# Altium PCB MyPCB1 — копия — копия.PcbDoc
Units mm, origin at the board's own origin, x right, y up, seen from the top; angles counter-clockwise.
Board outline 134 x 67 mm, 2 copper layers (Top Layer, Bottom Layer), stack 1.535 mm thick; 52 components, 66 nets, 237 pads, 60 vias.
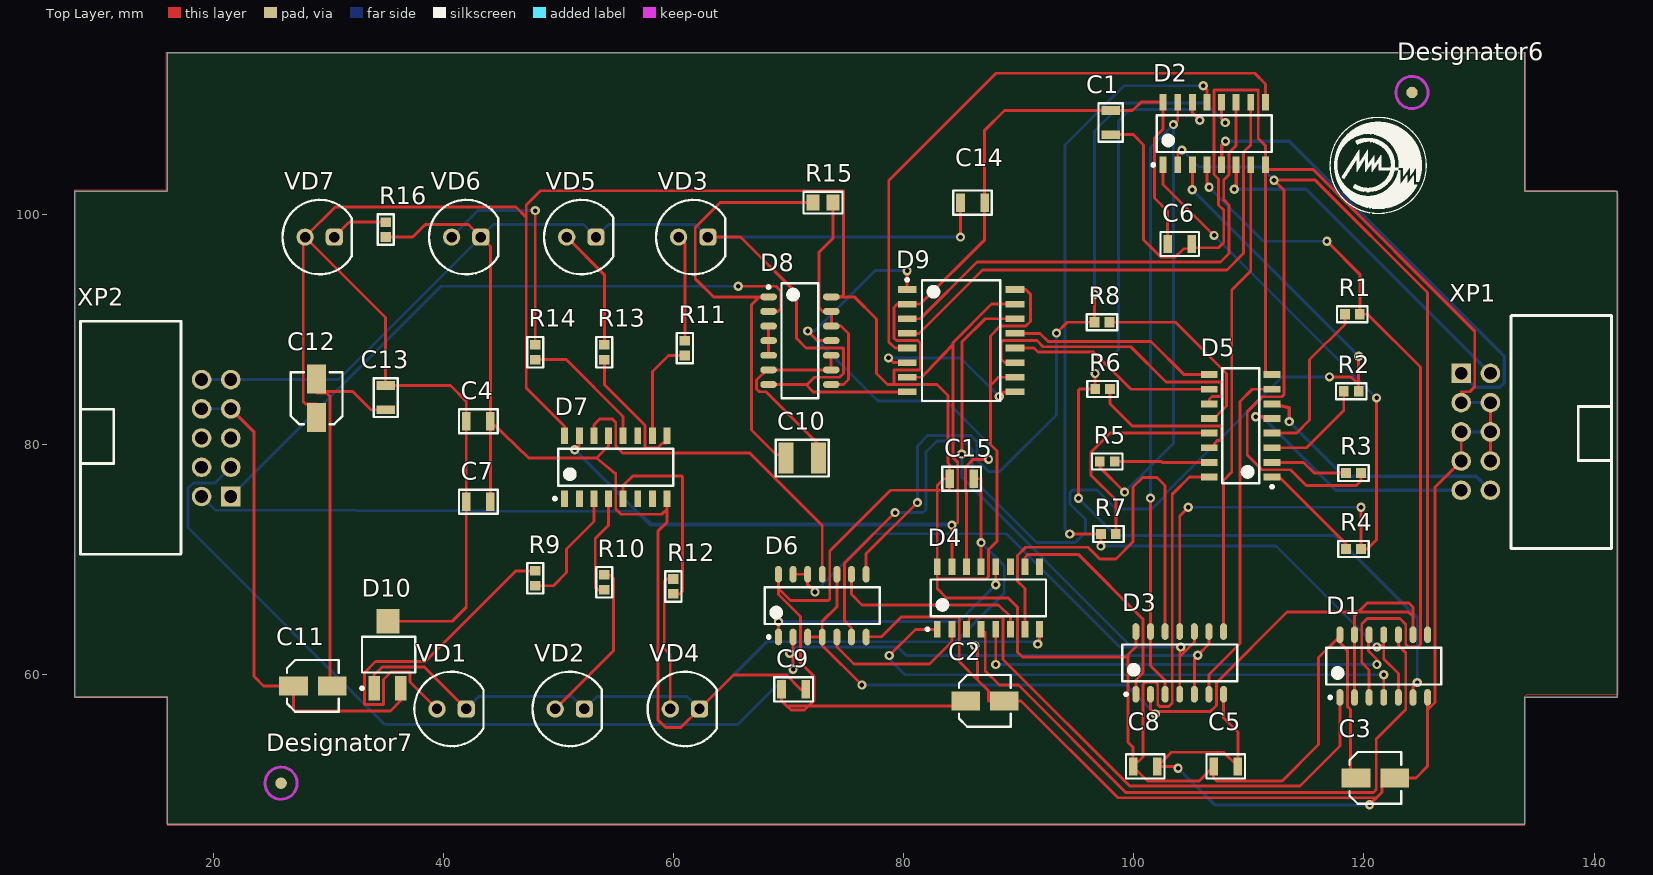
[diagram p0: Top Layer view]
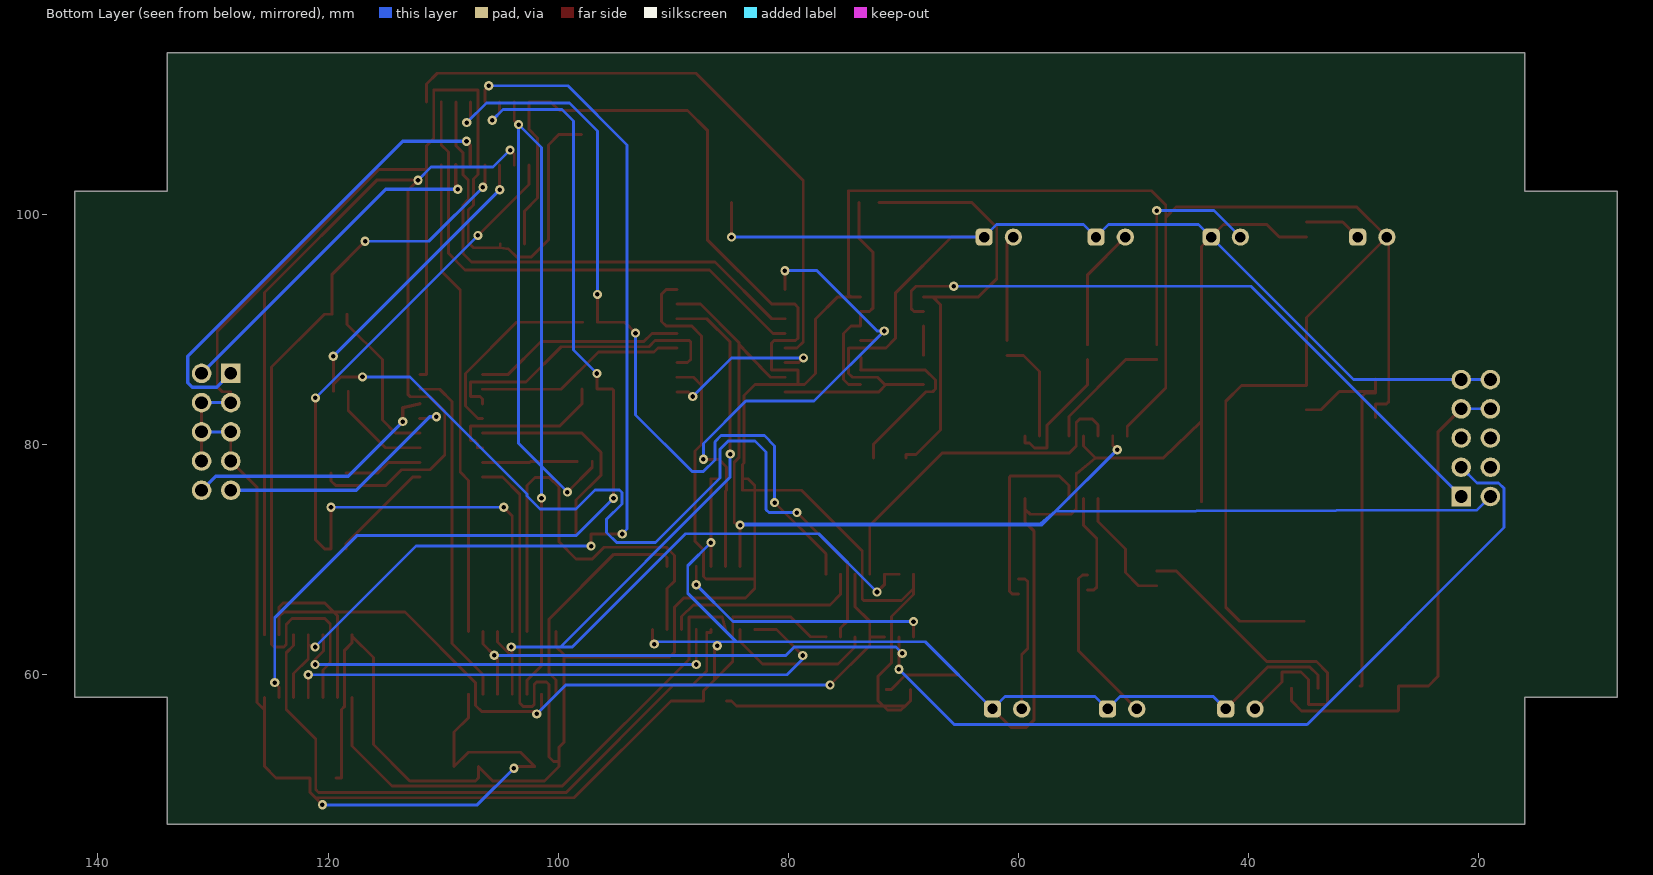
[diagram p1: Bottom Layer view, seen from below]
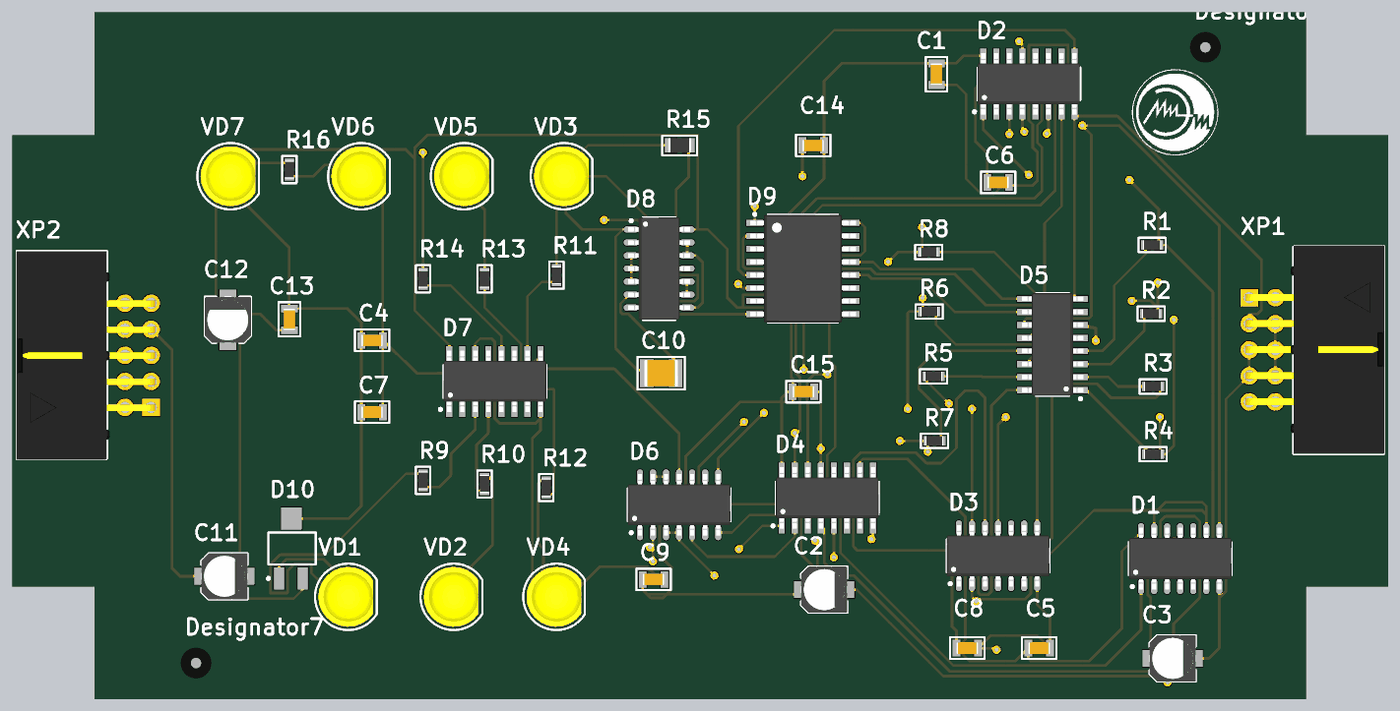
[diagram p2: 3D render of the assembled board from above, using the file's embedded part models]

## Layer stack, top to bottom
Top Solder: solder mask 0.0102, Solder Resist, Dk 3.5
Top Layer: signal copper 0.018
Dielectric 1: core 1.4986, Core-043, Dk 4.3
Bottom Layer: signal copper 0.018
Bottom Solder: solder mask 0.0102, Solder Resist, Dk 3.5

## Board outline
16,47 134,47 134,58 142,58 142,102 134,102 134,114 16,114 16,102 8,102 8,58 16,58

## Design rules (kind name [scope] priority, off if disabled: settings)
BoardOutlineClearance [All] p1: gap=0.5 ignorepadtopadclearanceinfootprint=FALSE except(0: Arc-SplitContinuation Track-SplitContinuation SMDPad-SplitContinuation THPad-SplitContinuation Via-SplitContinuation Fill-SplitContinuation Poly-SplitContinuation Region-SplitContinuation Text-SplitContinuation)
Clearance [All] p1: gap=0.2 ignorepadtopadclearanceinfootprint=FALSE
DiffPairsRouting [All] p1: maxlimit=0.4 minlimit=0.2 mostfreqgap=0.3 toplayer_minwidth=0.2 toplayer_maxwidth=0.381 toplayer_prefwidth=0.3 bottomlayer_minwidth=0.2 bottomlayer_maxwidth=0.381 bottomlayer_prefwidth=0.3 maxuncoupledlength=12.7
PolygonConnect [All] p1: connectstyle=Direct reliefconductorwidth=0.254 reliefentries=4 polygonreliefangle="90 Angle" airgapwidth=0.254
RoutingVias [All] p1: holewidth=0.4 width=0.8 viastyle="Through Hole" minholewidth=0.3 minwidth=0.6 maxholewidth=0.9 maxwidth=1.27
SolderMaskExpansion [All] p1: expansion=0.102
Width [All] p1: maxlimit=1 minlimit=0.2 preferedwidth=0.25
29 further rules are at their usual default settings.

## Classes and differential pairs
net class S[0..5]: S0 S1 S2 S3 S4 S5
net class ABC[0..7]: ABC0 ABC1 ABC2 ABC3 ABC4 ABC5 ABC6 ABC7
component class ivt33_kuznecov_list2_9var: C10 C11 C12 C13 C14 C15 D8 D9 R15 R16 VD7 XP2
component class ivt33_kuznecov_list1_9var: C1 C2 C3 C4 C5 C6 C7 C8 C9 D1 D2 D3 D4 D5 D6 D7 R1 R2 R3 R4 R5 R6 R7 R8 R9 R10 R11 R12 R13 R14 VD1 VD2 VD3 VD4 VD5 VD6 XP1
differential pair Out2: +Out2_P -Out2_N
differential pair Out1: +Out1_P -Out1_N

## Components (designator, comment, footprint, x,y, rotation, side; value= is the part's Value field where it differs from the comment)
C1 "" 0805_N 98,107.95 r90 top
C2 "*" CA010M0010REB-0405 87.075,57.7 r0 top
C3 "*" CA010M0010REB-0405 121,51 r0 top
C4 "" 0805_N 43.05,82 r180 top
C5 "" 0805_N 108,52 r0 top
C6 "" 0805_N 104,97.4 r180 top
C7 "" 0805_N 43.05,75 r180 top
C8 "" 0805_N 101,52 r0 top
C9 "" 0805_N 70.45,58.7 r180 top
C10 "1210" K10-79_3.2_2.5(1210) 71.2,78.8 r0 top
C11 "*" CA010M0010REB-0405 28.675,59 r0 top
C12 "*" CA010M0010REB-0405 29,84 r90 top
C13 "" 0805_N 35,84.05 r90 top
C14 "" 0805_N 86,101 r0 top
C15 "" 0805_N 85.05,77 r180 top
D1 "74AC00SC" SO14-N 121.73,60.725 r90 top
D2 "SOIC-16" SO16-N 107,107 r90 top
D3 "74AC00SC" SO14-N 104,61 r90 top
D4 "SOIC-16" SO16-N 87.376,66.642 r90 top
D5 "SOIC-16" SO16-N 109.3,81.6 r180 top
D6 "74AC00SC" SO14-N 72.94,65.975 r90 top
D7 "SOIC-16" SO16-N 55,78 r90 top
D8 "74AC00SC" SO14-N 71,89 r0 top
D9 "MC14520BDWG \"Motorola\"" SOIC-16W-N 85,89 r0 top
D10 "LM1117DTX" LM1117DTX-5.0/NOPB 36.297,61.722 r90 top
Designator6 "Comment" PCBComponent_1 124.181,110.566 r0 top
Designator7 "Comment" PCBComponent_1 25.908,50.546 r0 top
R1 "Р1-12-0,1 * 5%-M-\"A\" АЛЯР.434110.005 ТУ" RES_0603_1608_N 119,91.3 r180 top
R2 "Р1-12-0,1 * 5%-M-\"A\" АЛЯР.434110.005 ТУ" RES_0603_1608_N 118.9,84.6 r180 top
R3 "Р1-12-0,1 * 5%-M-\"A\" АЛЯР.434110.005 ТУ" RES_0603_1608_N 119.1,77.5 r180 top
R4 "Р1-12-0,1 * 5%-M-\"A\" АЛЯР.434110.005 ТУ" RES_0603_1608_N 119.1,70.9 r180 top
R5 "Р1-12-0,1 * 5%-M-\"A\" АЛЯР.434110.005 ТУ" RES_0603_1608_N 97.7,78.5 r0 top
R6 "Р1-12-0,1 * 5%-M-\"A\" АЛЯР.434110.005 ТУ" RES_0603_1608_N 97.3,84.8 r0 top
R7 "Р1-12-0,1 * 5%-M-\"A\" АЛЯР.434110.005 ТУ" RES_0603_1608_N 97.8,72.2 r0 top
R8 "Р1-12-0,1 * 5%-M-\"A\" АЛЯР.434110.005 ТУ" RES_0603_1608_N 97.25,90.6 r0 top
R9 "Р1-12-0,1 * 5%-M-\"A\" АЛЯР.434110.005 ТУ" RES_0603_1608_N 48,68.35 r90 top
R10 "Р1-12-0,1 * 5%-M-\"A\" АЛЯР.434110.005 ТУ" RES_0603_1608_N 54,68 r90 top
R11 "Р1-12-0,1 * 5%-M-\"A\" АЛЯР.434110.005 ТУ" RES_0603_1608_N 61,88.35 r90 top
R12 "Р1-12-0,1 * 5%-M-\"A\" АЛЯР.434110.005 ТУ" RES_0603_1608_N 60,67.65 r90 top
R13 "Р1-12-0,1 * 5%-M-\"A\" АЛЯР.434110.005 ТУ" RES_0603_1608_N 54,88 r90 top
R14 "Р1-12-0,1 * 5%-M-\"A\" АЛЯР.434110.005 ТУ" RES_0603_1608_N 48,88 r90 top
R15 "0805" RES_0805_2012_N 73,101 r0 top
R16 "Р1-12-0,1 * 5%-M-\"A\" АЛЯР.434110.005 ТУ" RES_0603_1608_N 35,98.65 r90 top
VD1 "*" LED_5mm 40.73,57 r0 top
VD2 "*" LED_5mm 51,57 r0 top
VD3 "*" LED_5mm 61.73,98 r0 top
VD4 "*" LED_5mm 61,57 r0 top
VD5 "*" LED_5mm 52,98 r0 top
VD6 "*" LED_5mm 42,98 r0 top
VD7 "*" LED_5mm 29.27,98 r0 top
XP1 "TE_1-1634689-0" BH-10R 129.73,81.08 r180 top
XP2 "TE_1-1634689-0" BH-10R 20.27,80.54 r0 top

## Footprints (in the part's own frame and the unit in brackets; to place one, negate y for a bottom-side part, rotate by r counter-clockwise, add the part's x,y. Pads: shape width x height; smd on the part's side, far side on the other; paste and mask are expansions set on the pad)
0805_N [mm] "Резистор, конденсатор"
  rect 0.75x1.6 smd: 1(-1.05,0) 2(1.05,0)
  silkscreen extent -1.67,-1.05 1.67,1.05, body extent -1.05,-0.58 1.05,0.58, height 1
BH-10R [mm] "Разъем угловой 2х5х2,54 типа ВН"
  rect 1.7x1.7 hole 1.1: 1(1.27,-5.08)
  round 1.7 hole 1.1: 2(-1.27,-5.08) 3(1.27,-2.54) 4(-1.27,-2.54) 5(1.27,0) 6(-1.27,0) 7(1.27,2.54) 8(-1.27,2.54) 9(1.27,5.08) 10(-1.27,5.08)
  silkscreen extent -11.8,-10.1 -3.05,10.15, body extent -11.85,-10.2 1.65,10.15, height 9.13
CA010M0010REB-0405 [mm] "Aluminum Electrolytic Capacitor, Body 4,30x4,30x6,30mm, IPC Medium Density"
  rect 2.5x1.65 smd: +(-1.675,0) -(1.675,0)
  silkscreen extent -2.25,-2.25 2.25,2.25, body extent -2.3,-2.25 2.3,2.25, height 6.3
K10-79_3.2_2.5(1210) [mm]
  rect 1.3x2.7 smd: 1(-1.4,0) 2(1.4,0)
  silkscreen extent -2.3,-1.6 2.3,1.6, body extent -1.65,-1.3 1.65,1.3, height 1.75
LED_5mm [mm]
  round 1.5 hole 0.9: A(-1.27,0)
  rrect50% 1.5x1.5 hole 0.9: C(1.27,0)
  silkscreen extent -3.24,-3.24 2.78,3.24, body extent -2.92,-2.92 2.41,2.92, height 10.71
LM1117DTX-5.0/NOPB [mm] "SOT223, 4-Leads, Body 6,50x7,00mm (avg), Pitch 2,30mm, IPC Medium Density"
  rect 2.15x1 smd: 1(-2.925,2.3) 2(-2.925,0)
  rect 2.15x2 smd: 3(2.9,1.1)
  silkscreen extent -3.05,-1.27 1.55,3.47, body extent -1.85,-1.27 1.85,3.35, height 1.8
PCBComponent_1 [mm]
  round 1 smd paste+0 mask+1: reper(0,0)
  Top Layer keep-out circle w0.254: c0,0 r1.397
RES_0603_1608_N [mm] "Chip Resistor, 2-Leads, Body 1,60x0,80mm, IPC Medium Density"
  rect 0.85x0.9 smd: 1(-0.65,0) 2(0.65,0)
  silkscreen extent -1.32,-0.7 1.33,0.7, body extent -0.87,-0.45 0.87,0.45, height 0.55
RES_0805_2012_N [mm] "Rezistor 0805"
  rect 1.15x1.4 smd: 1(-0.875,0) 2(0.875,0)
  silkscreen extent -1.7,-0.95 1.7,0.95, body extent -1.1,-0.7 1.1,0.7, height 0.6
SO14-N [mm]
  oval 1.45x0.6 smd: 1(-2.725,3.81) 2(-2.725,2.54) 3(-2.725,1.27) 4(-2.725,0) 5(-2.725,-1.27) 6(-2.725,-2.54) 7(-2.725,-3.81) 8(2.725,-3.81) 9(2.725,-2.54) 10(2.725,-1.27) 11(2.725,0) 12(2.725,1.27) 13(2.725,2.54) 14(2.725,3.81)
  silkscreen extent -2.85,-5 1.6,5, body extent -3,-5 3,5, height 1.45
SO16-N [mm] "SOIC, 16-Leads, Body 9,90x3,90mm, Pitch 1,27mm, IPC Medium Density"
  rect 1.45x0.6 smd: 1(-2.725,4.445) 2(-2.725,3.175) 3(-2.725,1.905) 4(-2.725,0.635) 5(-2.725,-0.635) 6(-2.725,-1.905) 7(-2.725,-3.175) 8(-2.725,-4.445) 9(2.725,-4.445) 10(2.725,-3.175) 11(2.725,-1.905) 12(2.725,-0.635) 13(2.725,0.635) 14(2.725,1.905) 15(2.725,3.175) 16(2.725,4.445)
  silkscreen extent -2.85,-5 1.6,5.42, body extent -3,-5 3,5, height 1.45
SOIC-16W-N [mm] "SOIC, 16-Leads, Body 10,30x7,50mm, Pitch 1,27mm, IPC Medium Density"
  rect 1.62x0.58 smd: 1(-4.69,4.445) 2(-4.69,3.175) 3(-4.69,1.905) 4(-4.69,0.635) 5(-4.69,-0.635) 6(-4.69,-1.905) 7(-4.69,-3.175) 8(-4.69,-4.445) 9(4.69,-4.445) 10(4.69,-3.175) 11(4.69,-1.905) 12(4.69,-0.635) 13(4.69,0.635) 14(4.69,1.905) 15(4.69,3.175) 16(4.69,4.445)
  silkscreen extent -4.81,-5.25 3.4,5.41, body extent -5.15,-5.25 5.15,5.25, height 2.65

## Part data
C1 C4 C5 C6 C7 C8 C9 C13 C14 C15: library part К10-79_0805_Н90, "Чип конденсатор 0805 Н90 ряд Е6", Case=0805, Manufacturer="ООО \"Кулон\"", Tolerance=+80%-20%, BOM="К10-79-*-B-*+80%-20%-Н90 АЖЯР.673511.004 ТУ", Created_by=Желобаев, Issue_date=19_12_2018, Name=К10-79, Name2="Конденсатор К10-79", TKE=Н90, TU="АЖЯР.673511.004 ТУ", Type=K10-79, Version=0, Weight=0.05
C2 C3 C11 C12: library part CA010M0010REB-0405, "Электролитический SND"
C10: library part К10-79_1210_Н30, "Чип конденсатор 1210 Н30 ряд Е6", Manufacturer="ООО \"Кулон\"", Tolerance=±20%, BOM="Конденсатор К10-79-*-B-*±20%-Н30 АЖЯР.673511.004 ТУ", Datum=19_12_2018, HelpURL=\\papa\Info\Altium_Library\Даташиты_и_ТУ\Конденсаторы_отечественные\К10-79_АЖЯР_673511_004ТУ.pdf, Hight=1.75, LibraryEngeneer=Желобаев, LiveStatus=производится, Name="Конденсатор К10-79", Packing=катушка, Permit MPSU=разрешен, Reliability=0.000005, Size=1210, TKE=Н30, TU="АЖЯР.673511.004 ТУ", Type=K10-79, Version=00, Weight=0.2
D1 D3 D6 D8: "4 элемента 2И-НЕ TTL SOIC-14", Case=SOIC-14, Manufacturer="ON Semiconductor", Power_Voltage="4.5 - 5.5 V", BOM="74AC00SC \"ON Semiconductor\"", Created_by=Желобаев, Issue_date=10.04.2019, Name=74AC00SC, Name2="Микросхема 74AC00SC", Version=0
D2 D5: library part 74HCT151D, "мультиплексор 8 канальный TTL", Manufacturer="NXP Semiconductors", Power_Voltage="4.5 -5.5 V", BOM="74HCT151D \"NXP Semiconductors\"", Case=SOIC-16, Created_by=Желобаев, Issue_date=05.04.2019, Name=74HCT151D, Name2="Микросхема 74HCT151D", Version=0
D4 D7: library part HCF4017BM1, "Декадный счетчик c 10 декодированными выходами", Manufacturer=STMicroelectronics, Power_Voltage="-0.5 -22 V", BOM="HCF4017BM1 \"STMicroelectronics\"", Case=SOIC-16, Created_by=Желобаев, Issue_date=05.04.2019, Name=HCF4017BM1, Name2="Микросхема HCF4017BM1", Version=0
D9: library part MC14520BDWG, "Два двоичных счетчика", Case=SOIC-16, Manufacturer=Motorola, BOM="MC14520BDWG \"Motorola\"", Created_by=Желобаев, Issue_date=6.01.2019, Name=MC14520BDWG, Name2="Микросхема MC14520BDWG", Version=0
D10: library part LT1117
R1 R2 R3 R4 R5 R6 R7 R8 R9 R10 R11 R12 R13 R14 R16: library part Р1-12-0,1-5%, "Резистор от 0,75 Ом до 10 МОм", Case=0603, Manufacturer="ОАО \"НПО \"Эркон\"", Tolerance=5%, Voltage=50, BOM="Р1-12-0,1 * 5%-M-\"A\" АЛЯР.434110.005 ТУ", Created_by=Желобаев, Issue_date=10.04.2019, Name=Р1-12-0,1, Name2="Резистор Р1-12-0,1", Size=0603, TKR=M, TU="АЛЯР.434110.005 ТУ", Type="Р1-12-0,1±5%-М-\"А\"", Version=00, Weight=0,005
R15: library part Р1-12-0,125-5%, "Резистор от 0,75 Ом до 2 МОм", Manufacturer="ОАО \"НПО \"Эркон\"", Tolerance=5%, Voltage=150, BOM="Р1-12-0,125 * 5%-M-\"A\" АЛЯР.434110.005 ТУ", Case=0805, Created_by=Желобаев, Issue_date=05_12_2018, Name=Р1-12-0,125, Name2="Резистор Р1-12-0,125", Size=0805, TKR=M, TU="АЛЯР.434110.005 ТУ", Type="Р1-12-0,125±5%-М-\"А\"", Version=00, Weight=0,01
VD1 VD2 VD3 VD4 VD5 VD6 VD7: library part 521-9466, "Светодиод,5мм,жёлтый", Manufacture=Dialight, BOM="521-9466 \"Dialight\"", Name=521-9466
XP1 XP2: "Вилка типа BH-10R угловая правая двухрядная 2х5х2.54", Case=BH-10R, Manufacturer="TE Connectivity", BOM="TE_1-1634689-0 \"TE Connectivity\"", Created_by=Желобаев, Issue_date=13.05.2019, Name=TE_1-1634689-0, Name2="Вилка угловая TE_1-1634689-0", Version=0

## Via types
v1: diameter 0.8, hole 0.4, Top Layer to Bottom Layer, 60 vias

## Nets (pads, with @x,y where several pads share a name; then routed paths per layer and width w, separated by ;. In a path a pad name is that pad's centre, name@x,y a point inside that pad or via, vN(x,y) a via of type N, cw(c..) or ccw(c..) an arc to the next point about the centre after c; other vN are vias at no path point)
+5V: C1.2 C2.+ C3.+ C4.2 C5.1 C6.2 C7.2 C8.1 C9.2 C12.+ C13.2 C14.2 C15.2 D1.14 D2.16 D3.14 D4.16 D5.16 D6.14 D7.16 D8.14 D9.2 D9.10 D9.16 D10.3 VD7.A | length 441.5
  Top Layer w0.25: C12.+ 29,83.49 28.042,83.49 27.838,83.693 27.838,98 VD7.A ; D10.3 40.785,64.622 42,65.837 C7.2 C4.2 42,83.74 40.64,85.1 C13.2 34.976,85.1 34.976,91.024 VD7.A ; D7.16 50.555,81.55 47.219,84.887 47.219,99.72 ; D6.14 69.13,67.462 ; C9.2 69.4,57.709 69.857,57.252 ; D8.14 74.574,92.81 ; C2.+ 84.963,57.7 84.515,57.252 71.755,57.252 ; D9.10 88.265,85.825 87.543,85.103 ; D9.16 90.627,93.445 91.034,93.039 91.034,90.678 90.627,90.272 88.407,90.272 87.543,89.408 87.543,85.103 ; D3.14 100.19,62.408 99.517,61.735 99.517,61.506 ; C6.2 102.95,100.25 101.803,101.397 101.803,106.614 102.555,107.366 D2.16 100.623,109.725 99.898,109 C1.2 88.76,109 87.05,107.29 C14.2 87.05,97.767 81.458,92.175 D9.2 79.451,92.175 79.172,91.896 79.172,89.205 79.375,89.002 81.255,89.002 81.458,88.798 81.458,86.462 79.172,86.462 79.172,85.192 ; D5.16 104.851,77.155 103.355,75.659 103.355,57.506 103.074,57.225 102.235,57.225 102.085,57.375 102.085,59.131 101.882,59.334 101.018,59.334 100.815,59.131 100.815,52.832 100.409,52.426 C8.1@99.95,52.426 ; D1.14 D1.14@117.92,63.322 ; C3.+ 118.847,51 118.847,56.947 118.565,57.228 118.565,62.103 117.92,62.748 D1.14@117.92,63.322 ; VD7.A 30.609,100.609 46.33,100.609 47.219,99.72 ; 47.219,99.72 47.219,100.787 48.463,102.032 74.778,102.032 74.778,93.013 74.574,92.81 ; 69.13,67.462 70.171,66.421 73.457,66.421 73.584,66.548 73.584,70.723 78.857,75.997 82.931,75.997 ; 69.13,67.462 69.13,66.938 71.044,65.024 71.044,61.011 72.212,59.842 72.212,57.709 71.755,57.252 ; 69.857,57.252 70.213,56.896 71.399,56.896 71.755,57.252 ; 69.857,57.252 71.755,57.252 ; 74.574,92.81 75.719,92.81 77.648,90.881 77.648,86.157 78.613,85.192 79.172,85.192 ; 79.172,85.192 82.906,85.192 83.864,84.233 83.864,78.378 84,78.242 C15.2 ; 82.931,68.301 87.173,68.301 87.376,68.504 87.376,70.827 88.115,71.565 88.115,79.414 87.543,79.986 87.543,85.103 ; 82.931,68.301 D4.16 82.931,75.997 ; 82.931,68.301 82.931,67.462 83.744,66.65 89.103,66.65 89.916,65.837 89.916,61.925 90.335,61.506 99.517,61.506 ; 82.931,75.997 84,75.997 C15.2 ; 82.931,75.997 82.931,76.403 83.528,77 C15.2 ; 99.517,61.506 99.517,54.103 99.95,53.67 C8.1@99.95,52.426 ; C8.1@99.95,52.426 C8.1 101.201,50.749 105.699,50.749 C5.1 106.95,51.003 107.204,50.749 112.903,50.749 116.053,53.899 116.053,61.455 D1.14@117.92,63.322
+9V: C11.+ D10.2 XP2.7 XP2.8 | length 43.3
  Top Layer w0.25: XP2.7 23.571,81.049 23.571,59.813 24.384,59 C11.+@26.975,59 ; C11.+ C11.+@26.975,59 ; D10.2 36.297,57.709 35.408,56.82 27.051,56.82 26.975,56.896 C11.+@26.975,59
  Bottom Layer w0.25: XP2.8 XP2.7
ABC0: D1.3 D2.4 R1.1 | length 67.1
  Top Layer w0.25: D2.4 106.365,102.525 v1(106.553,102.337) ; v1(116.789,97.638) 119.65,94.777 R1.1 120.32,91.3 124.915,86.705 124.915,62.595 124.702,62.382 123.848,62.382 123.645,62.586 123.645,64.34 123.139,64.846 120.294,64.846 119.815,64.367 119.815,61.036 120.46,60.391 D1.3
  Bottom Layer w0.25: v1(106.553,102.337) 111.252,97.638 v1(116.789,97.638)
ABC1: D2.3 D6.6 R2.1 | length 101.1
  Top Layer w0.25: D6.6 75.48,64.042 74.854,64.668 74.854,69.647 v1(79.266,74.059) ; v1(105.095,102.108) D2.3 ; v1(117.018,85.852) 118.897,85.852 119.55,85.199 ; R2.1 119.55,85.199 ; v1(119.55,87.653) 119.55,85.199
  Bottom Layer w0.25: v1(79.266,74.059) 81.686,74.059 81.94,74.313 81.94,79.313 82.906,80.278 85.234,80.278 85.939,79.573 85.939,77.078 91.567,71.45 94.92,71.45 95.809,72.339 95.809,73.482 94.474,74.817 94.474,75.819 94.691,76.036 96.811,76.036 98.476,74.371 101.6,74.371 102.718,75.489 102.718,75.676 112.894,85.852 v1(117.018,85.852) ; v1(105.095,102.108) v1(119.55,87.653)
ABC2: D1.8 D2.2 R3.1 | length 96.1
  Top Layer w0.25: D2.2 103.825,105.197 v1(104.191,105.562) ; R3.1 119.75,76.81 119.344,76.403 114.991,76.403 113.614,77.78 111.145,77.78 109.867,79.059 109.867,82.831 111.165,84.13 112.865,84.13 113.075,84.34 113.075,102.063 v1(112.192,102.946) 115.773,102.946 125.54,93.179 D1.8
  Bottom Layer w0.25: v1(104.191,105.562) 105.664,104.089 111.049,104.089 v1(112.192,102.946)
ABC3: D2.1 D3.11 R4.1 | length 71.7
  Top Layer w0.25: D2.1 102.555,102.575 v1(106.985,98.146) ; D3.11 104,73.774 v1(104.75,74.524) ; v1(119.75,74.524) R4.1 120.303,70.9 121.107,71.704 v1(121.107,84.023)
  Bottom Layer w0.25: v1(104.75,74.524) v1(119.75,74.524) ; v1(106.985,98.146) v1(121.107,84.023)
ABC4: D2.15 D3.3 D3.13 R5.1 | length 90.2
  Top Layer w0.25: R5.1 97.05,78.007 v1(99.212,75.844) ; v1(101.46,75.324) D3.13 101.46,60.757 102.73,59.487 D3.3 ; v1(103.454,107.772) 103.825,108.143 D2.15
  Bottom Layer w0.25: v1(99.212,75.844) 101.46,78.092 ; v1(101.46,75.324) 101.46,78.092 ; 101.46,78.092 101.46,105.778 v1(103.454,107.772) 103.454,80.086 101.46,78.092
ABC5: D1.6 D2.14 R6.1 | length 85.5
  Top Layer w0.25: v1(95.199,75.311) 95.199,84.698 95.301,84.8 R6.1 v1(96.65,86.149) ; D2.14 105.095,108.798 v1(105.74,108.153) ; D1.6 124.27,58.916 v1(124.638,59.284)
  Bottom Layer w0.25: v1(95.199,75.311) 98.425,72.085 117.475,72.085 124.638,64.922 v1(124.638,59.284) ; v1(96.65,86.149) 98.679,88.178 98.679,108.102 99.67,109.093 104.8,109.093 v1(105.74,108.153)
ABC6: D1.5 D1.11 D2.13 R7.1 | length 87.7
  Top Layer w0.25: v1(94.445,72.2) R7.1 v1(97.15,71.145) ; v1(106.045,111.15) 106.365,110.83 D2.13 ; v1(121.133,62.382) 121.73,62.586 ; D1.11 121.73,62.586 ; D1.5 123,60.071 121.73,61.341 121.73,62.586
  Bottom Layer w0.25: v1(94.445,72.2) 94.024,72.621 94.024,106.013 99.162,111.15 v1(106.045,111.15) ; v1(97.15,71.145) 112.37,71.145 v1(121.133,62.382)
ABC7: D2.12 D6.8 R8.1 | length 72.1
  Top Layer w0.25: D6.8 76.75,70.476 v1(81.204,74.93) ; v1(93.294,89.662) 94.232,90.6 R8.1 v1(96.6,93.019) ; D2.12 107.635,108.265 v1(107.95,107.95)
  Bottom Layer w0.25: v1(81.204,74.93) 81.204,79.858 82.093,80.747 85.853,80.747 86.389,80.211 86.389,78.635 87.401,77.622 88.367,77.622 93.294,82.55 v1(93.294,89.662) ; v1(96.6,93.019) 96.6,107.217 99.035,109.652 106.248,109.652 v1(107.95,107.95)
GND: C1.1 C2.- C3.- C4.1 C5.2 C6.1 C7.1 C8.2 C9.1 C14.1 C15.1 D1.7 D2.8 D3.7 D4.8 D4.13 D5.8 D6.7 D7.8 D7.13 D8.7 D9.8 D10.1 R16.1 VD1.C VD2.C VD3.C VD4.C VD5.C VD6.C XP1.3 XP1.4 XP1.5 XP1.6 XP1.7 XP1.8 XP2.9 XP2.10 | length 523.5
  Top Layer w0.25: D10.1 33.997,59.944 34.7,60.647 38.353,60.647 VD1.C ; R16.1 37.345,98 38.43,99.085 42.185,99.085 VD6.C 44.1,97.17 C4.1 C4.1@44.1,81.991 ; C7.1 C4.1@44.1,81.991 ; D7.13 54.365,79.858 53.306,78.799 ; D7.8 59.445,74.371 ; VD3.C 65.83,98 70.714,93.116 70.714,89.179 71.526,88.367 74.75,88.367 74.775,88.341 74.775,86.157 74.445,85.827 72.265,85.827 71.628,85.19 71.51,85.19 ; D8.7 71.51,85.19 ; C9.1 71.069,58.7 69.825,59.944 65.214,59.944 VD4.C 60.642,55.372 59.334,55.372 58.649,56.058 58.649,72.432 59.445,73.228 59.445,74.371 ; D6.7 76.75,63.271 78.08,63.271 79.781,64.973 84.836,64.973 84.836,61.112 86.423,59.525 ; D9.8 72.145,84.555 71.51,85.19 ; v1(84.95,98) C14.1 ; C15.1 86.741,77 v1(86.741,71.45) D4.13 ; v1(86.182,62.484) 86.423,62.243 86.423,59.525 ; v1(91.669,62.636) 91.821,62.789 D4.8 ; C1.1 99.974,106.9 100.863,106.011 100.863,97.765 102.353,96.275 103.616,96.275 104.318,96.977 C6.1@105.05,97.079 ; v1(103.861,51.841) 103.702,52 C8.2 103.288,53.238 107.812,53.238 C5.2 109.05,54.991 107.81,56.231 D3.7 ; C6.1 C6.1@105.05,97.079 ; D5.8 111.445,86.045 D2.8@111.445,103.861 ; v1(120.498,48.666) 121.107,49.276 ; D1.7 125.54,56.921 ; XP1.5 XP1.7 126.187,76.267 126.187,57.569 125.54,56.921 ; XP1.3 128.46,84.557 129.21,84.557 129.642,84.988 129.642,89.814 115.595,103.861 D2.8@111.445,103.861 ; XP1.8 XP1.6 XP1.4 ; C4.1@44.1,81.991 47.447,78.791 53.306,78.799 ; 53.306,78.799 54.991,77.445 54.991,74.371 55.448,73.914 58.988,73.914 59.445,74.371 ; 86.423,59.525 87.376,58.572 87.376,57.7 C2.- 90.221,57.7 98.645,49.276 121.107,49.276 ; C6.1@105.05,97.079 107.366,97.079 107.823,97.536 107.823,100.353 107.373,100.803 107.373,103.046 106.99,103.429 106.99,110.795 110.82,110.795 110.82,106.568 111.445,105.943 D2.8 D2.8@111.445,103.861 ; 121.107,49.276 121.59,49.759 121.59,51 C3.- 124.521,51 125.54,52.019 125.54,56.921
  Bottom Layer w0.25: XP2.10 XP2.9 30.89,85.62 VD6.C 44.355,99.085 52.185,99.085 VD5.C 54.355,99.085 61.915,99.085 VD3.C v1(84.95,98) ; VD1.C 43.09,58.09 51.18,58.09 VD2.C 53.36,58.09 61.18,58.09 VD4.C 68.11,62.84 84.531,62.84 ; v1(86.182,62.484) 86.182,62.763 v1@86.106,62.84 ; v1(86.741,71.45) 88.748,69.444 88.748,67.056 84.531,62.84 ; v1(91.669,62.636) 91.465,62.84 v1@86.106,62.84 ; v1(103.861,51.841) 107.036,48.666 v1(120.498,48.666) ; XP1.5 XP1.6 ; XP1.3 XP1.4 ; 84.531,62.84 v1@86.106,62.84
NetC10_1: C10.1 D8.1 R15.1 | length 38.7
  Top Layer w0.25: D8.1 67.462,92.81 ; C10.1 69.8,79.096 68.91,79.096 66.775,81.231 66.775,92.123 67.462,92.81 ; R15.1 64.068,101 61.9,98.831 61.9,94.386 63.476,92.81 67.462,92.81
NetC10_2: C10.2 D8.6 D8.9 D8.10 | length 17.5
  Top Layer w0.25: C10.2 72.6,80.003 68.047,84.557 67.462,84.557 67.225,84.794 67.225,85.578 68.107,86.46 D8.6 70.993,86.46 D8.9@73.7,86.46 ; D8.9 D8.9@73.7,86.46 ; D8.10 73.725,87.545 73.7,87.545 D8.9@73.7,86.46
NetC11_-: C11.- C12.- C13.1 | length 34.5
  Top Layer w0.25: C12.- C12.-@29,84.582 ; C11.- 30.175,59 30.175,84.15 29.87,84.455 29,84.455 C12.-@29,84.582 ; C13.1 33.713,83 32.131,84.582 C12.-@29,84.582
NetD1_2: D1.2 D1.9 D1.13 D3.2 D6.3 D6.4 D6.10 | length 84
  Top Layer w0.25: D6.3 D6.4 ; D6.10 74.21,65.881 72.94,64.611 D6.4 ; v1(76.378,59.08) 72.94,62.518 D6.4 ; D3.2 101.46,56.972 v1@101.657,56.775 ; v1(101.866,56.566) v1@101.657,56.775 ; D1.2 D1.13 119.19,65.101 119.519,65.43 ; D1.9 124.27,65.024 ; v1@101.657,56.775 106.657,56.775 107.185,57.302 107.185,59.281 113.335,65.43 119.519,65.43 ; 119.519,65.43 123.864,65.43 124.27,65.024 ; 119.519,65.43 120.294,66.206 123.901,66.206 124.27,65.837 124.27,65.024
  Bottom Layer w0.25: v1(76.378,59.08) 99.352,59.08 v1(101.866,56.566)
NetD2_7: D2.7 D3.8 | length 41.5
  Top Layer w0.25: D3.8 107.81,76.862 108.525,77.577 108.525,93.416 110.175,95.066 D2.7
NetD3_4: D3.4 D3.10 D6.12 D6.13 D9.14 | length 86
  Top Layer w0.25: D6.13 D6.12 71.67,67.793 v1(72.305,67.158) ; v1(85.065,79.146) 85.065,88.873 87.097,90.905 D9.14 ; D3.4 104,61.546 ; v1(104.089,62.382) 104,62.293 104,61.546 ; D3.10 105.27,62.816 104,61.546
  Bottom Layer w0.25: v1(72.305,67.158) 77.37,72.223 88.94,72.223 98.781,62.382 99.822,62.382 ; v1(85.065,79.146) 85.065,77.14 99.822,62.382 ; v1(104.089,62.382) 99.822,62.382
NetD3_5: D3.5 D3.9 D6.2 XP2.3 | length 114.7
  Top Layer w0.25: v1(70.104,61.824) 70.4,62.12 ; v1(70.4,60.452) 70.4,62.12 ; D6.2 70.4,62.12 ; D3.5 105.27,61.366 v1(105.561,61.657) 106.54,62.636 D3.9
  Bottom Layer w0.25: XP2.3 20.175,76.635 18.288,76.635 17.825,76.172 17.825,72.751 34.925,55.651 65.599,55.651 v1(70.4,60.452) ; v1(70.104,61.824) 70.651,62.371 79.501,62.371 80.215,61.657 v1(105.561,61.657)
NetD3_6: D3.6 D5.7 | length 29.8
  Top Layer w0.25: D3.6 106.54,59.982 109.245,62.687 109.245,83.718 110.302,84.775 D5.7
NetD4_12: D4.12 D6.1 | length 23.1
  Top Layer w0.25: D6.1 69.13,64.583 v1(69.139,64.592) ; v1(88.011,67.793) D4.12
  Bottom Layer w0.25: v1(69.139,64.592) 84.811,64.592 v1(88.011,67.793)
NetD4_14: D4.14 D8.11 D9.1 | length 46.9
  Top Layer w0.25: v1(71.679,89.84) 72.519,89 D8.11 ; D9.1 v1(80.31,95.077) ; D4.14 85.471,75.921 85.395,75.997 85.395,78.029 86.055,78.689 v1(87.39,78.689)
  Bottom Layer w0.25: v1(80.31,95.077) 80.289,95.098 77.546,95.098 72.288,89.84 v1(71.679,89.84) 77.775,83.744 83.705,83.744 87.39,80.059 v1(87.39,78.689)
NetD5_1: D5.1 R4.2 | length 9.3
  Top Layer w0.25: D5.1 112.644,77.155 118.45,71.349 R4.2
NetD5_2: D5.2 R3.2 | length 6.8
  Top Layer w0.25: D5.2 114.757,78.425 115.682,77.5 R3.2
NetD5_3: D5.3 R2.2 | length 9.2
  Top Layer w0.25: D5.3 115.011,79.695 118.25,82.934 R2.2
NetD5_4: D5.4 R1.2 | length 14.2
  Top Layer w0.25: D5.4 114.163,80.965 115.291,82.093 115.291,87.351 118.35,90.41 R1.2
NetD5_12: D5.12 R8.2 | length 16.8
  Top Layer w0.25: R8.2 103.632,90.6 108.075,86.157 108.075,83.33 106.98,82.235 D5.12
NetD5_13: D5.13 R7.2 | length 19
  Top Layer w0.25: R7.2 98.45,75.143 96.291,77.302 96.291,79.299 97.958,80.965 D5.13
NetD5_14: D5.14 R6.2 | length 14.6
  Top Layer w0.25: R6.2 97.95,83.515 99.875,81.59 107.625,81.59 107.625,80.315 107.264,80.315 107.01,80.061 107.01,79.695 D5.14
NetD5_15: D5.15 R5.2 | length 8.3
  Top Layer w0.25: R5.2 102.413,78.5 102.488,78.425 D5.15
NetD6_11: D6.11 D7.14 | length 30.3
  Top Layer w0.25: D7.14 53.095,81.686 53.603,82.194 54.686,82.194 54.991,81.89 54.991,79.858 55.624,79.225 66.647,79.225 72.94,72.932 D6.11
NetD7_3: D7.3 R9.1 | length 10.6
  Top Layer w0.25: R9.1 49.581,67.7 50.724,68.843 50.724,70.908 53.095,73.279 D7.3
NetD7_4: D7.4 R10.1 | length 9.1
  Top Layer w0.25: R10.1 53.442,67.35 53.213,67.579 53.213,71.806 54.365,72.958 D7.4
NetD7_5: D7.5 R12.1 | length 17.5
  Top Layer w0.25: D7.5 55.635,76.403 56.457,77.225 60.722,77.225 60.782,77.165 60.782,67.229 60.554,67 R12.1
NetD7_9: D7.9 R13.1 | length 11.8
  Top Layer w0.25: R13.1 54,85.192 57.55,81.642 57.55,79.675 58.617,79.675 59.054,80.112 59.445,80.112 D7.9
NetD7_10: D7.10 R11.1 | length 9
  Top Layer w0.25: D7.10 58.175,86.312 59.563,87.7 R11.1
NetD7_12: D7.12 R14.1 | length 11.4
  Top Layer w0.25: R14.1 50.699,87.35 55.635,82.414 D7.12
NetD8_3: D8.3 D8.4 D8.5 | length 2.5
  Top Layer w0.25: D8.5 D8.4 D8.3
NetD8_8: D8.8 D8.12 D8.13 R15.2 | length 19.6
  Top Layer w0.25: D8.8 74.778,85.19 75.225,85.638 75.225,89.619 74.574,90.27 D8.12 D8.13 72.949,91.54 72.669,91.819 72.669,96.698 73.875,97.903 R15.2
NetD9_6: D9.6 D9.9 | length 14.3
  Top Layer w0.25: v1(78.692,87.503) 79.1,87.095 D9.6 ; v1(88.316,84.15) 88.721,84.555 D9.9
  Bottom Layer w0.25: v1(78.692,87.503) 84.963,87.503 v1(88.316,84.15)
NetR9_2: R9.2 VD1.A | length 31.9
  Top Layer w0.25: VD1.A 37.122,59.338 37.122,60.197 35.472,60.197 34.823,59.549 34.823,57.379 33.147,57.379 33.147,60.147 34.112,61.112 38.442,61.112 46.33,69 R9.2
NetR10_2: R10.2 VD2.A | length 14.3
  Top Layer w0.25: VD2.A 54.788,62.058 54.788,68.32 54.458,68.65 R10.2
NetR11_2: R11.2 VD3.A | length 9.2
  Top Layer w0.25: VD3.A 61,97.46 R11.2
NetR12_2: R12.2 VD4.A | length 12.2
  Top Layer w0.25: VD4.A 59.73,61.722 59.207,62.245 59.207,68.072 59.435,68.3 R12.2
NetR13_2: R13.2 VD5.A | length 10.7
  Top Layer w0.25: VD5.A 54,94.73 R13.2
NetR14_2: R14.2 VD6.A | length 19.9
  Top Layer w0.25: R14.2 v1(48,100.305)
  Bottom Layer w0.25: VD6.A 43.035,100.305 v1(48,100.305)
NetR16_2: R16.2 VD7.C | length 5
  Top Layer w0.25: VD7.C 31.84,99.3 R16.2
ON/OFF: D8.2 XP2.1 | length 58.2
  Top Layer w0.25: v1(65.634,93.726) 68.919,93.726 69.325,93.32 69.325,91.777 69.088,91.54 D8.2
  Bottom Layer w0.25: XP2.1 39.806,93.726 v1(65.634,93.726)
Out1_N: D2.6 XP1.2 | length 31.1
  Top Layer w0.3: v1(108.737,102.159) 108.905,102.326 D2.6
  Bottom Layer w0.3: v1(108.737,102.159) 115.001,102.159 XP1.2
Out1_P: D2.5 XP1.1 | length 40.9
  Top Layer w0.3: D2.5 107.635,105.989 v1(107.981,106.334)
  Bottom Layer w0.3: v1(107.981,106.334) 113.528,106.334 132.207,87.655 132.207,85.344 131.801,84.938 129.682,84.938 XP1.1
Out2_N: D5.6 XP1.10 | length 22.7
  Top Layer w0.3: D5.6 113.513,83.175 v1(113.513,81.966)
  Bottom Layer w0.3: v1(113.513,81.966) 118.262,77.216 129.784,77.216 XP1.10
Out2_P: D5.5 XP1.9 | length 22
  Top Layer w0.3: v1(110.592,82.398) 111.176,82.398 111.338,82.235 D5.5
  Bottom Layer w0.3: v1(110.592,82.398) 111.176,82.398 117.573,76 XP1.9
Reset: D4.15 D7.15 D9.7 D9.15 XP2.2 | length 134.9
  Top Layer w0.25: v1(51.435,79.527) 51.825,79.917 D7.15 ; D9.7 81.553,85.825 81.967,86.239 84.314,88.688 ; D4.15 v1(84.201,72.974) 84.709,73.177 84.709,78.433 84.314,78.828 84.314,88.688 ; D9.15 87.655,92.175 84.314,88.834 84.314,88.688
  Bottom Layer w0.25: XP2.2 20.175,74.285 56.792,74.171 ; v1(51.435,79.527) 56.792,74.171 ; 56.792,74.171 58.102,73.088 84.087,73.088 v1(84.201,72.974) 57.988,72.974 56.792,74.171
S0: D2.11 D9.3 | length 44.1
  Top Layer w0.25: D9.3 81.458,90.905 86.378,95.825 107.534,95.825 108.28,96.571 108.28,100.796 107.823,101.253 107.823,102.962 108.28,103.419 108.28,105.334 108.905,105.959 D2.11
S1: D2.10 D9.4 | length 45.5
  Top Layer w0.25: D9.4 81.355,89.635 86.868,95.148 108.102,95.148 109.55,96.596 109.55,105.385 110.175,106.01 D2.10
S2: D2.9 D9.5 | length 54.4
  Top Layer w0.25: D9.5 79.248,88.365 78.715,88.898 78.715,102.921 88.036,112.243 110.515,112.243 111.445,111.313 D2.9
S3: D5.11 D9.11 | length 26.3
  Top Layer w0.25: D9.11 88.776,87.095 88.495,87.376 88.495,88.876 88.621,89.002 91.591,89.002 92.119,88.473 99.741,88.473 102.794,85.42 107.625,85.42 107.625,84.15 106.803,84.15 106.575,83.922 D5.11
S4: D5.10 D9.12 | length 18.4
  Top Layer w0.25: D9.12 91.332,88.365 91.674,88.023 96.513,88.023 99.761,84.775 D5.10
S5: D5.9 D9.13 | length 18.4
  Top Layer w0.25: D9.13 91.857,89.635 92.569,88.923 101.516,88.923 104.394,86.045 D5.9
STROB0: D1.1 D4.3 | length 47.2
  Top Layer w0.25: D4.3 85.75,64.973 88.646,64.973 88.646,61.3 99.654,50.292 114.44,50.292 117.92,53.772 D1.1
STROB1: D4.2 D6.5 | length 13.3
  Top Layer w0.25: D6.5 74.21,62.391 75.684,60.917 82.253,60.917 84.201,62.865 D4.2
STROB2: D1.10 D4.4 | length 57.2
  Top Layer w0.25: D4.4 86.741,63.625 87.096,63.625 87.096,60.3 88.327,59.069 89.978,59.069 99.314,49.733 120.828,49.733 121.082,49.987 121.082,54.384 123.645,56.947 123.645,61.874 123,62.519 D1.10
STROB3: D3.12 D4.7 | length 38.9
  Top Layer w0.25: D4.7 90.551,67.462 89.916,68.097 89.916,70.333 90.627,71.044 96.037,71.044 97.053,70.028 98.45,70.028 99.949,71.526 99.949,76.276 100.787,77.114 102.032,77.114 102.73,76.416 D3.12
STROB4: D3.1 D4.10 | length 20.3
  Top Layer w0.25: D4.10 90.551,70.155 90.83,70.434 95.176,70.434 100.815,64.795 100.815,60.147 100.19,59.522 D3.1
STROB5: D1.4 D4.1 | length 50.9
  Top Layer w0.25: v1(78.765,61.646) 81.026,63.906 82.931,63.906 D4.1 ; D1.4 v1(121.73,59.969)
  Bottom Layer w0.25: v1(78.765,61.646) 78.765,61.341 80.137,59.969 v1(121.73,59.969)
STROB6: D1.12 D4.5 | length 39.1
  Top Layer w0.25: v1(88.011,60.858) D4.5 ; D1.12 120.46,63.017 120.396,62.953 120.396,62.027 121.133,61.29 v1(121.133,60.858)
  Bottom Layer w0.25: v1(88.011,60.858) v1(121.133,60.858)
STROB7: D4.6 D6.9 | length 17.4
  Top Layer w0.25: D6.9 75.48,66.963 76.403,66.04 88.265,66.04 89.281,65.024 D4.6
pads on no net: D4.9 D4.11 D7.1 D7.2 D7.6 D7.7 D7.11 Designator6.reper Designator7.reper XP2.4 XP2.5 XP2.6

## Polygon pours and split planes (outlines as drawn)
no net on Top Layer "NONET_L01_P013" (solid, remove dead copper, pour order 13): 8,102.1 15.908,102.1 15.951,102.057 15.951,114.046 134.01,114.046 134.01,102.057 141.757,102.057 142.062,101.752 142.062,58.242 134.163,58.242 133.96,58.039 133.96,46.838 16.053,46.838 16.053,58.039 8.103,58.039 8,58.142

## Silkscreen, mask and mechanical layers (free items; w line width, h text height)
Top Overlay:
  drawing of 3 lines, arcs and shapes, not listed
Mechanical 5:
  text "CA010M0010REB-0405" at 109,101 h1.52